# Altium PCB nanoSTM32.PcbDoc
Units mm, origin at the board's own origin, x right, y up, seen from the top; angles counter-clockwise.
Board outline 60.2 x 25.4 mm, 2 copper layers (Top Layer, Bottom Layer); 24 components, 45 nets, 142 pads, 47 vias.
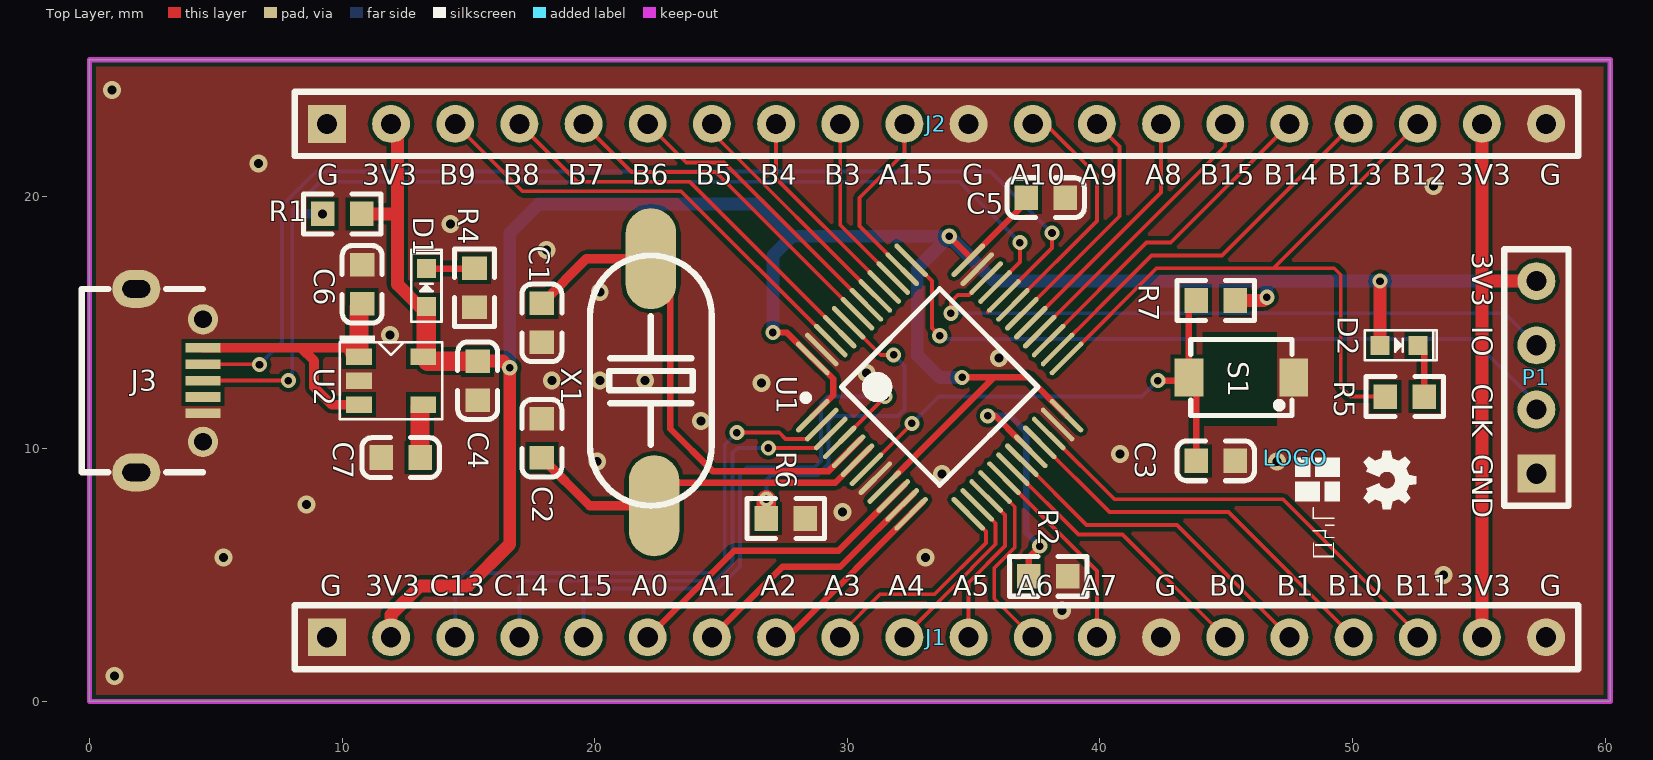
[diagram p0: Top Layer view]
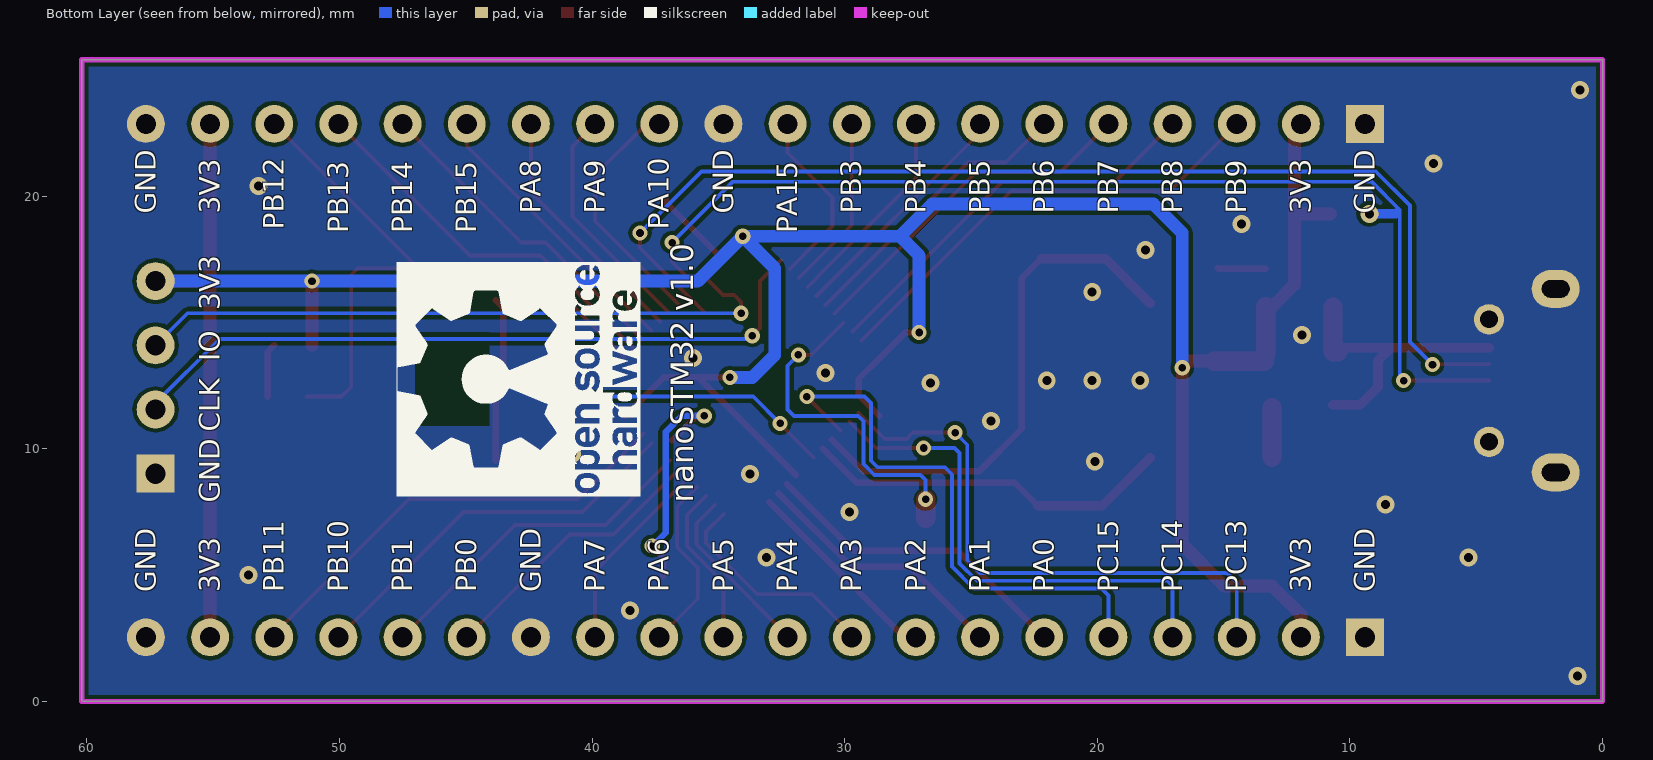
[diagram p1: Bottom Layer view, seen from below]
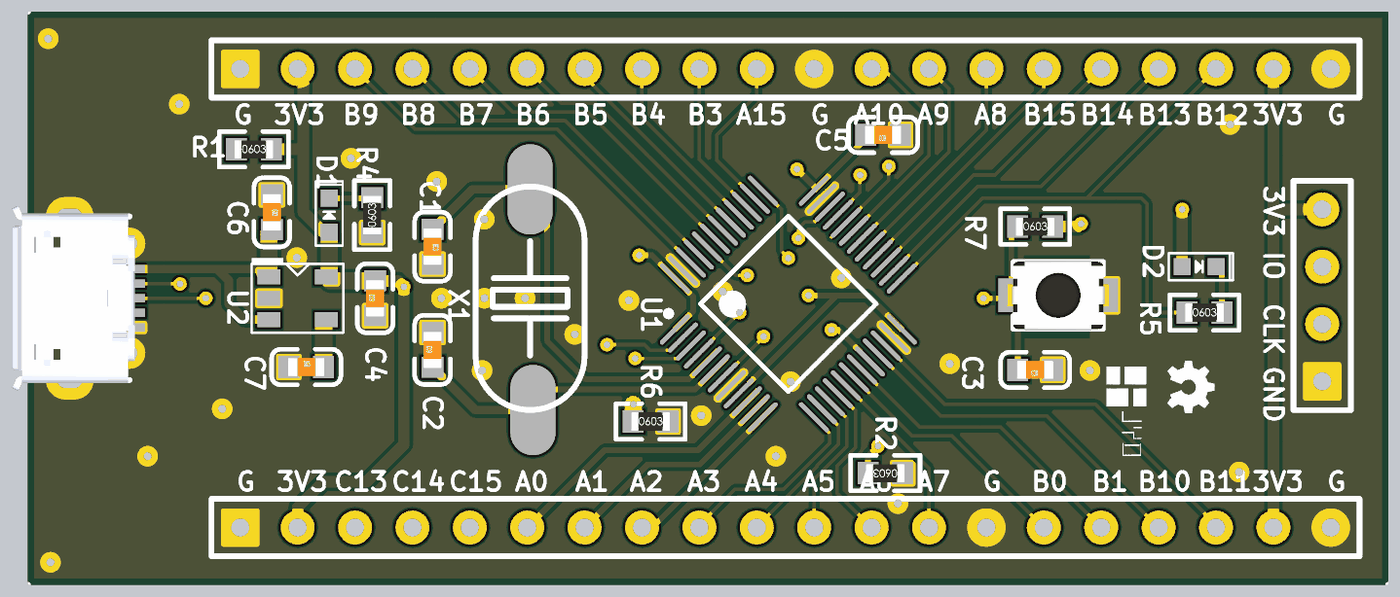
[diagram p2: 3D render of the assembled board from above, using the file's embedded part models]

## Layer stack, top to bottom
Top Solder: solder mask 0.0102, Solder Resist, Dk 3.5
Top Layer: signal copper 0.0356
Dielectric1: dielectric 0.32, FR-4, Dk 4.8
Bottom Layer: signal copper 0.0356
Bottom Solder: solder mask 0.0102, Solder Resist, Dk 3.5

## Board outline
0,0 60.198,0 60.198,25.4 0,25.4

## Design rules (kind name [scope] priority, off if disabled: settings)
Clearance [All] p1: gap=0.152 ignorepadtopadclearanceinfootprint=FALSE except(0: Arc-Hole Track-Hole SMDPad-Hole THPad-Hole Via-Hole Fill-Hole Poly-Hole Region-Hole Text-Hole)
ComponentClearance [All] p1 off: gap=0.254 collisioncheckmode=3 verticalgap=0.254 showdistances=FALSE
DiffPairsRouting [All] p1: maxlimit=0.254 minlimit=0.254 mostfreqgap=0.254 toplayer_minwidth=0.381 toplayer_maxwidth=0.381 toplayer_prefwidth=0.381 bottomlayer_minwidth=0.381 bottomlayer_maxwidth=0.381 bottomlayer_prefwidth=0.381 maxuncoupledlength=12.7
PolygonConnect [All] p1: connectstyle=Direct reliefconductorwidth=0.254 reliefentries=4 polygonreliefangle="90 Angle" airgapwidth=0.254
RoutingVias [All] p1: holewidth=0.711 width=1.27 viastyle="Through Hole" minholewidth=0.711 minwidth=1.27 maxholewidth=0.711 maxwidth=1.27
SolderMaskExpansion [All] p1: expansion=0.102
Width [All] p1: maxlimit=2.54 minlimit=0.152 preferedwidth=0.254
28 further rules are at their usual default settings.

## Classes and differential pairs
differential pair USB: +USB_P -USB_N

## Components (designator, comment, footprint, x,y, rotation, side; value= is the part's Value field where it differs from the comment)
C1 "C0603" 0603_C 17.907,14.986 r270 top value=20pF
C2 "C0603" 0603_C 17.907,10.414 r90 top value=20pF
C3 "C0603" 0603_C 44.577,9.525 r180 top value=0.1uF
C4 "1uf" 0603_C 15.367,12.7 r90 top value=1uF
C5 "104" 0603_C 37.846,19.939 r180 top value=0.1uF
C6 "1uf" 0603_C 10.795,16.51 r270 top value=1uF
C7 "223" 0603_C 12.319,9.652 r0 top
D1 "RED" 0603_LED 13.335,16.383 r90 top
D2 "GREEN" 0603_LED 51.835,14.097 r0 top
J1 "Header 20" HEADER_20x1 9.398,2.54 r0 top
J2 "Header 20" HEADER_20x1 9.398,22.86 r0 top
J3 "Micro USB B" MICRO_USB 3.175,12.7 r90 top
LOGO "LOGO" LOGO 47.752,9.652 r270 top (schematic designator logo)
P1 "Header 4" HEADER_4x1 57.277,9.017 r90 top
R1 "R0603" 0603_R 10,19.3 r0 top value=1.5K
R2 "R0603" 0603_R 37.948,4.953 r180 top value=10K
R4 "R0603" 0603_R 15.24,16.383 r90 top value=1K
R5 "R0603" 0603_R 52.07,12.065 r0 top value=1K
R6 "R0603" 0603_R 27.559,7.239 r0 top value=10K
R7 "R0603" 0603_R 44.577,15.875 r0 top value=10K
S1 "SW-PB" SMT_SW_PTS_820 45.593,12.827 r180 top
U1 "STM32F103C8T6" LQFP48_N 33.655,12.446 r45 top
U2 "RT9193-33" SOT23-5 11.938,12.7 r90 top
X1 "XTAL" 49SMD 22.225,12.7 r270 top value=8MHz

## Footprints (in the part's own frame and the unit in brackets; to place one, negate y for a bottom-side part, rotate by r counter-clockwise, add the part's x,y. Pads: shape width x height; smd on the part's side, far side on the other; paste and mask are expansions set on the pad)
49SMD [mm]
  oval 4x2 smd: 1(-4.826,0) 2(4.953,0.127)
  silkscreen extent -4.95,-2.41 4.95,2.41
0603_C [mm]
  rect 0.93x0.98 smd: 1(-0.77,0) 2(0.77,0)
  silkscreen extent -1.53,-0.79 1.54,0.79, body extent -0.8,-0.4 0.8,0.4, height 0.3
0603_LED [mm]
  rect 0.75x0.75 smd: 1(-0.75,0) 2(0.75,0)
  silkscreen extent -1.35,-0.6 1.5,0.6
0603_R [mm]
  rect 0.93x0.98 smd: 1(-0.77,0) 2(0.77,0)
  silkscreen extent -1.53,-0.79 1.54,0.79, body extent -0.85,-0.4 0.85,0.4, height 0.56
HEADER_4x1 [mm]
  rect 1.5x1.5 hole 0.8: 1(0,0)
  round 1.5 hole 0.8: 2(2.54,0) 3(5.08,0) 4(7.62,0)
  silkscreen extent -1.27,-1.27 8.89,1.27
HEADER_20x1 [mm]
  rect 1.5x1.5 hole 0.8: 1(0,0)
  round 1.5 hole 0.8: 2(2.54,0) 3(5.08,0) 4(7.62,0) 5(10.16,0) 6(12.7,0) 7(15.24,0) 8(17.78,0) 9(20.32,0) 10(22.86,0) 11(25.4,0) 12(27.94,0) 13(30.48,0) 14(33.02,0) 15(35.56,0) 16(38.1,0) 17(40.64,0) 18(43.18,0) 19(45.72,0) 20(48.26,0)
  silkscreen extent -1.27,-1.27 49.53,1.27
LOGO [mm]
  silkscreen extent -0.01,-0.01 3.95,1.74
LQFP48_N [mm]
  oval 1.8x0.2 smd: 1(-4.35,2.75) 2(-4.35,2.25) 3(-4.35,1.75) 4(-4.35,1.25) 5(-4.35,0.75) 6(-4.35,0.25) 7(-4.35,-0.25) 8(-4.35,-0.75) 9(-4.35,-1.25) 10(-4.35,-1.75) 11(-4.35,-2.25) 12(-4.35,-2.75) 25(4.35,-2.75) 26(4.35,-2.25) 27(4.35,-1.75) 28(4.35,-1.25) 29(4.35,-0.75) 30(4.35,-0.25) 31(4.35,0.25) 32(4.35,0.75) 33(4.35,1.25) 34(4.35,1.75) 35(4.35,2.25) 36(4.35,2.75)
  oval 0.2x1.8 smd: 13(-2.75,-4.35) 14(-2.25,-4.35) 15(-1.75,-4.35) 16(-1.25,-4.35) 17(-0.75,-4.35) 18(-0.25,-4.35) 19(0.25,-4.35) 20(0.75,-4.35) 21(1.25,-4.35) 22(1.75,-4.35) 23(2.25,-4.35) 24(2.75,-4.35) 37(2.75,4.35) 38(2.25,4.35) 39(1.75,4.35) 40(1.25,4.35) 41(0.75,4.35) 42(0.25,4.35) 43(-0.25,4.35) 44(-0.75,4.35) 45(-1.25,4.35) 46(-1.75,4.35) 47(-2.25,4.35) 48(-2.75,4.35)
  silkscreen extent -4.17,-2.75 2.75,3.57
MICRO_USB [mil]
  rect 15x54 smd: 1(51,-52) 2(25.5,-52) 3(0,-52) 4(-25.5,-52) 5(-51,-52)
  oval 59.06x74.8 hole 27.56 slot 43.31 at 90 deg: 6(-143,52) 7(143,52)
  round 47.24 hole 27.5: 8(95.5,-52) 9(-95.5,-52)
  silkscreen extent -143,-52 143,137, body extent -161,-61 161,152, height 105
SMT_SW_PTS_820 [mm] "SMT Tactile ?Switch PTS 820 Series"
  rect 1.143x1.5 smd: 1(-2.075,0) 2(2.075,0)
  round 0 all layers, no hole paste-2.54 mask-2.54: MH1(0,0.9) MH2(0,-0.9)
  silkscreen extent -2,-1.5 2,1.5, body extent -2.25,-1.55 2.25,1.55, height 2.05
SOT23-5 [mil]
  rect 26x40 smd: 1(37.4,50) 2(0,50) 3(-37.4,50) 4(-37.4,-50) 5(37.4,-50)
  silkscreen extent -60,-80 70,80

## Part data
C1 C2 C3: "Capacitor", LatestRevisionDate=17-Jul-2002, LatestRevisionNote="Re-released for DXP Platform.", PackageDescription="Radial Cap, Thru-Hole; 2 Leads; 0.3 in Pin Spacing", PackageReference=RAD-0.3, Published=8-Jun-2000, Publisher="Altium Limited"
C4 C5 C6 C7: library part CAP, "Capacitor"
D1 D2: library part D0603, "Typical RED, GREEN, YELLOW, AMBER GaAs LED", LatestRevisionDate=17-Jul-2002, LatestRevisionNote="Re-released for DXP Platform.", PackageDescription="SM LED; 2 Flat Leads", PackageReference=3.2X1.6X1.1, PackageVersion=Feb-2002, Published=8-Jun-2000, Publisher="Altium Limited"
LOGO: library part logo
P1: "Header, 4-Pin", LatestRevisionDate=17-Jul-2002, LatestRevisionNote="Re-released for DXP Platform.", Publisher="Altium Limited"
R1 R2 R4 R5 R6 R7: "Resistor", LatestRevisionDate=17-Jul-2002, LatestRevisionNote="Re-released for DXP Platform.", PackageDescription="Axial Device, Thru-Hole; 2 Leads; 0.3 in Pin Spacing", PackageReference=AXIAL-0.3, Published=8-Jun-2000, Publisher="Altium Limited"
S1: "Switch", LatestRevisionDate=17-Jul-2002, LatestRevisionNote="Re-released for DXP Platform.", PackageDescription="Switch; 2 Leads", PackageReference=SPST-2, Published=24-Mar-1999, Publisher="Altium Limited"
U1: "LowPower MCU"

## Via types
v1: diameter 0.711, hole 0.356, Top Layer to Bottom Layer, 26 vias
v2: diameter 0.6, hole 0.3, Top Layer to Bottom Layer, 21 vias

## Nets (pads, with @x,y where several pads share a name; then routed paths per layer and width w, separated by ;. In a path a pad name is that pad's centre, name@x,y a point inside that pad or via, vN(x,y) a via of type N, cw(c..) or ccw(c..) an arc to the next point about the centre after c; other vN are vias at no path point)
3V3: C4.2 C5.2 D1.1 D2.1 J1.2 J1.19 J2.2 J2.19 P1.4 R1.2 R7.2 U1.1 U1.9 U1.24 U1.36 U1.48 U2.5 | length 134.7
  Top Layer w0.254: v2(27.051,14.605) 27.607,14.605 U1.48 29.439,12.773 29.439,12.119 U1.1 ; U1.9@31.929,8.952 35.804,12.827 ; v2(34.036,18.415) 34.828,17.623 34.828,17.508 37.076,19.756 C5.2 ; v2(34.544,12.827) 35.804,12.827 ; U1.24 37.163,12.827 35.804,12.827
  Top Layer w0.381: U2.5@13.335,13.777 U2.5 U2.5@13.388,13.47
  Top Layer w0.508: R1.2 12.192,19.3 ; J1.2 11.938,3.429 13.081,4.572 14.986,4.572 16.637,6.223 v2(16.637,13.208) 16.375,13.47 C4.2 ; J2.2 12.192,22.606 12.192,19.3 ; D1.1 13.069,15.633 12.192,16.51 12.192,19.3 ; R7.2 46.482,15.875 v2(46.609,16.002) ; D2.1 v2(51.085,16.637) ; J1.19 55.118,16.637 ; J2.19 55.118,16.637 ; P1.4 55.118,16.637
  Top Layer w0.762: U2.5@13.335,13.777 D1.1 ; U2.5@13.388,13.47 C4.2
  Bottom Layer w0.508: v2(16.637,13.208) 16.637,18.542 17.78,19.685 26.543,19.685 27.813,18.415 ; v2(27.051,14.605) 27.051,17.653 27.813,18.415 ; v2(34.544,12.827) 33.655,12.827 32.766,13.716 32.766,17.145 v2(34.036,18.415) ; v2(46.609,16.002) 46.609,16.637 ; P1.4 v2(51.085,16.637) 46.609,16.637 ; 27.813,18.415 v2(34.036,18.415) ; v2(34.036,18.415) 35.814,16.637 46.609,16.637
5V_USB: C6.2 J3.1 U2.1 U2.3 | length 12
  Top Layer w0.381: J3.1 8.382,13.995 ; U2.1@10.475,13.843 10.323,13.995 8.382,13.995 ; U2.3 9.586,11.75 8.89,12.446 8.89,13.487 8.382,13.995 ; C6.2@10.668,15.613 C6.2
  Top Layer w0.762: U2.1@10.475,13.843 10.668,13.843 C6.2@10.668,15.613
BOOT0: R6.1 U1.44 | length 13.8
  Top Layer w0.152: U1.44 31.324,13.716 v2(31.832,13.716)
  Top Layer w0.254: v2@26.789,7.993 v2(26.797,8.001)
  Top Layer w0.762: R6.1 v2@26.789,7.993
  Bottom Layer w0.152: v2(26.797,8.001) 26.797,8.763 27,8.966 28.828,8.966 29.261,9.399 29.261,11.1 29.464,11.303 32.004,11.303 32.258,11.557 32.258,13.29 v2(31.832,13.716)
BOOT1: R2.2 U1.20 | length 9.6
  Top Layer w0.254: v2(35.56,11.303) 35.859,11.303 U1.20@36.818,10.343 ; R2.2 37.178,5.707 v2(37.617,6.147)
  Bottom Layer w0.254: v2(35.56,11.303) 36.449,11.303 37.084,10.668 37.084,6.68 v2(37.617,6.147)
GND: C1.2 C2.2 C3.1 C4.1 C5.1 C6.1 C7.1 J1.1 J1.14 J1.20 J2.1 J2.11 J2.20 J3.5 J3.6 J3.7 J3.8 J3.9 P1.1 R2.1 R4.1 R6.2 S1.1 U1.8 U1.23 U1.35 U1.47 U2.2
  other v1: 1,1 38.5,3.6 53.6,5 5.3,5.7 33.1,5.7 29.8,7.5 8.6,7.8 33.75,9 20.1,9.5 47,9.5 40.8,9.8 24.2,11.1 26.6,12.6 18.3,12.7 20.2,12.7 22,12.7 30.75,13 36,13.6 11.9,14.5 20.2,16.2 18.093,17.873 14.3,18.9 53.2,20.4 6.7,21.3 0.9,24.2
NetC1_1: C1.1 U1.5 X1.1 | length 20.8
  Top Layer w0.254: X1.1 22.987,16.764 22.987,10.795 24.663,9.119 29.267,9.119 U1.5 U1.5@30.515,10.367
  Top Layer w0.381: C1.1 19.677,17.526 X1.1
NetC2_1: C2.1 U1.6 X1.2 | length 14.7
  Top Layer w0.254: X1.2 23.266,8.661 29.517,8.661 U1.6@30.868,10.013
  Top Layer w0.381: C2.1 19.804,7.747 X1.2
NetC7_2: C7.2 U2.4 | length 2.1
  Top Layer w0.381: U2.4@13.089,11.631 U2.4
  Top Layer w0.762: C7.2 U2.4@13.089,11.631
NetD1_2: D1.2 R4.2 | length 1.9
  Top Layer w0.254: D1.2 15.22,17.133 R4.2
NetD2_2: D2.2 R5.2 | length 2.1
  Top Layer w0.254: D2.2 52.84,13.842 R5.2
NRST: C3.2 R7.1 S1.2 U1.7 | length 20.1
  Top Layer w0.152: U1.7@31.222,9.659 v2@32.557,10.994
  Top Layer w0.254: v2(42.291,12.7) S1.2@43.518,12.7 ; C3.2 43.807,12.411 S1.2@43.518,12.7 ; R7.1 43.518,15.586 S1.2@43.518,12.7
  Bottom Layer w0.152: v2(32.557,11.004) 33.617,12.065 41.656,12.065 v2(42.291,12.7)
PA0: J1.6 U1.10 | length 12.7
  Top Layer w0.254: J1.6 25.527,5.969 29.653,5.969 U1.10@32.283,8.599
PA1: J1.7 U1.11 | length 10.4
  Top Layer w0.254: J1.7 27.432,5.334 29.725,5.334 U1.11@32.636,8.245
PA2: J1.8 U1.12 | length 8
  Top Layer w0.254: J1.8 27.638,2.54 U1.12@32.99,7.892
PA3: J1.9 U1.13 | length 8.9
  Top Layer w0.152: J1.9 J1.9@29.718,2.661 ; J1.9@29.718,2.781 J1.9@29.718,2.661 ; U1.13 35.484,6.728 35.484,6.273 33.453,4.242 31.299,4.242 J1.9@29.718,2.661
PA4: J1.10 U1.14 | length 7
  Top Layer w0.152: J1.10 32.258,2.59 34.925,5.257 34.925,5.283 35.865,6.223 35.865,7.054 U1.14
PA5: J1.11 U1.15 | length 6.5
  Top Layer w0.152: J1.11 34.798,4.699 36.246,6.147 36.246,7.38 U1.15
PA6: J1.12 U1.16 | length 7.2
  Top Layer w0.152: U1.16 36.627,7.706 36.627,6.097 35.814,5.284 35.814,4.064 J1.12
PA7: J1.13 U1.17 | length 7.8
  Top Layer w0.152: U1.17 39.878,5.162 J1.13
PA8: J2.14 U1.29 | length 9.9
  Top Layer w0.152: U1.29@37.303,15.033 42.418,20.148 J2.14
PA9: J2.13 U1.30 | length 9.4
  Top Layer w0.152: U1.30@36.95,15.387 40.767,19.204 40.767,21.971 J2.13
PA10: J2.12 U1.31 | length 9.8
  Top Layer w0.152: U1.31@36.596,15.741 39.878,19.023 39.878,20.828 37.846,22.86 J2.12
PA15: J2.10 U1.38 | length 7.5
  Top Layer w0.152: J2.10@32.004,22.606 J2.10 32.258,21.717 30.48,19.939 30.48,18.821 31.623,17.678 31.623,17.66 U1.38
PB0: J1.15 U1.18 | length 11.2
  Top Layer w0.152: U1.18 39.143,6.604 40.894,6.604 J1.15
PB1: J1.16 U1.19 | length 13.5
  Top Layer w0.152: U1.19 39.47,6.985 43.053,6.985 J1.16
PB3: J2.9 U1.39 | length 7
  Top Layer w0.152: J2.9 29.718,18.858 U1.39
PB4: J2.8 U1.40 | length 8.2
  Top Layer w0.152: J2.8 27.178,20.701 31.064,16.815 31.064,16.805 U1.40
PB5: J2.7 U1.41 | length 9.6
  Top Layer w0.152: J2.7 24.81,22.86 24.81,22.352 U1.41
PB6: J2.6 U1.42 | length 11.6
  Top Layer w0.152: J2.6 23.622,21.336 25.119,21.336 U1.42
PB7: J2.5 U1.43 | length 14
  Top Layer w0.152: J2.5 21.463,20.955 24.792,20.955 U1.43
PB8: J2.4 U1.45 | length 16.1
  Top Layer w0.152: J2.4 19.304,20.574 23.759,20.574 U1.45
PB9: J2.3 U1.46 | length 18.4
  Top Layer w0.152: J2.3 17.145,20.193 23.419,20.193 29.327,14.284 U1.46
PB10: J1.17 U1.21 | length 15.6
  Top Layer w0.152: U1.21@37.634,10.235 40.376,7.493 45.085,7.493 J1.17
PB11: J1.18 U1.22 | length 18
  Top Layer w0.152: U1.22 40.575,8.001 47.244,8.001 52.578,2.667 J1.18
PB12: J2.18 R5.1 U1.25 | length 26.8
  Top Layer w0.152: U1.25@38.717,13.619 42.243,17.145 46.863,17.145 ; R5.1 49.911,12.065 49.53,12.446 49.53,16.891 49.276,17.145 46.863,17.145 ; J2.18 46.863,17.145
PB13: J2.17 U1.26 | length 15.4
  Top Layer w0.152: U1.26@38.364,13.973 39.878,15.487 39.878,15.494 42.037,17.653 44.831,17.653 J2.17
PB14: J2.16 U1.27 | length 13
  Top Layer w0.152: U1.27@38.01,14.326 41.845,18.161 42.799,18.161 J2.16
PB15: J2.15 U1.28 | length 11.2
  Top Layer w0.152: U1.28@37.657,14.68 44.958,21.981 J2.15
PC13: J1.3 U1.2 | length 22.8
  Top Layer w0.152: v2(25.629,10.643) 27.305,10.643 27.559,10.389 28.416,10.389 U1.2 U1.2@29.454,11.427
  Bottom Layer w0.152: J1.3 14.478,4.699 14.859,5.08 24.638,5.08 25.146,5.588 25.146,10.16 v2(25.629,10.643)
PC14: J1.4 U1.3 | length 20.1
  Top Layer w0.152: v2(26.873,10.033) 28.767,10.033 U1.3 U1.3@29.808,11.074
  Bottom Layer w0.152: J1.4 17.018,4.572 17.221,4.775 24.764,4.775 25.451,5.462 25.451,9.83 25.654,10.033 v2(26.873,10.033)
PC15: J1.5 U1.4 | length 22.2
  Top Layer w0.152: U1.4@30.161,10.72 31.496,12.055 v2(31.496,12.065)
  Bottom Layer w0.152: J1.5 19.558,4.191 19.837,4.47 24.891,4.47 25.756,5.335 25.756,8.992 26.035,9.271 28.702,9.271 28.956,9.525 28.956,11.811 29.21,12.065 v2(31.496,12.065)
SWCLK: P1.2 U1.37 | length 28.4
  Top Layer w0.152: U1.37 33.353,16.637 33.353,14.78 v2(33.655,14.478)
  Bottom Layer w0.152: v2(33.655,14.478) 33.782,14.351 54.737,14.351 57.277,11.811 P1.2
SWDIO: P1.3 U1.34 | length 26
  Top Layer w0.152: v2(34.101,15.367) 34.101,15.813 34.372,16.084 34.818,16.084 U1.34@35.535,16.801
  Bottom Layer w0.152: v2(34.101,15.367) 56.007,15.367 P1.3
USB_N: J3.2 U1.32 | length 45.1
  Top Layer w0.152: J3.2 6.718,13.348 v2(6.731,13.335) ; 35.56,15.412 36.242,16.094 38.1,17.952 v2(38.1,18.542)
  Bottom Layer w0.152: v2(6.731,13.335) 7.62,14.224 7.62,19.625 8.976,20.98 35.662,20.98 v2(38.1,18.542)
USB_P: J3.3 R1.1 U1.33 | length 43.7
  Top Layer w0.152: J3.3 v2(7.874,12.7) ; U1.33@35.889,16.448 36.83,17.389 v2(36.83,18.161)
  Bottom Layer w0.152: v2(7.874,12.7) 8.026,12.852 8.026,19.456 9.144,20.574 34.417,20.574 v2(36.83,18.161)
  Bottom Layer w0.381: 8.141,19.342 8.183,19.3 v1(9.23,19.3)
pads on no net: J3.4 S1.MH1 S1.MH2

## Polygon pours and split planes (outlines as drawn)
GND on Top Layer "GND_L01_P000" (solid, remove dead copper, pour order 0): 0.144,25.473 60.342,25.473 60.342,0.073 0.144,0.073
GND on Bottom Layer "GND_L02_P002" (solid, remove dead copper, pour order 2): 0.203,25.349 60.401,25.349 60.401,-0.051 0.203,-0.051

## Keep-outs
Keep-Out Layer:
  the board outline again, w0.2

## Other copper
Top Layer:
  pour cut-out: 44.069,14.605 46.99,14.605 46.99,10.922 44.069,10.922
Bottom Layer:
  pour cut-out: 44.069,14.605 46.99,14.605 46.99,10.922 44.069,10.922

## Silkscreen, mask and mechanical layers (free items; w line width, h text height)
Top Overlay:
  region: 52.516,8.608 52.507,8.605 52.228,8.552 52.22,8.548 52.217,8.542 52.121,8.309 52.118,8.303 52.122,8.295 52.281,8.06 52.285,8.051 52.28,8.04 52.279,8.041 52.079,7.839 52.068,7.834 52.059,7.838 51.825,7.997 51.816,8.001 51.81,7.999 51.577,7.902 51.571,7.9 51.568,7.891 51.514,7.612 51.511,7.604 51.499,7.599 51.499,7.6 51.215,7.599 51.204,7.604 51.2,7.612 51.201,7.612 51.147,7.891 51.144,7.9 51.138,7.902 50.904,7.999 50.899,8.001 50.89,7.997 50.655,7.838 50.647,7.834 50.635,7.839 50.636,7.84 50.434,8.04 50.43,8.051 50.433,8.06 50.593,8.295 50.596,8.303 50.594,8.309 50.55,8.416 50.547,8.422 50.552,8.433 50.558,8.436 51.04,8.632 51.046,8.635 51.057,8.63 51.059,8.625 51.055,8.623 51.121,8.525 51.229,8.453 51.357,8.427 51.485,8.453 51.594,8.525 51.667,8.634 51.692,8.762 51.667,8.89 51.594,8.999 51.485,9.071 51.357,9.097 51.229,9.071 51.121,8.999 51.055,8.901 51.059,8.899 51.057,8.894 51.046,8.889 51.04,8.892 50.558,9.088 50.552,9.091 50.547,9.102 50.55,9.108 50.594,9.215 50.596,9.221 50.593,9.229 50.433,9.464 50.43,9.473 50.434,9.484 50.435,9.483 50.635,9.685 50.647,9.69 50.655,9.686 50.89,9.527 50.899,9.523 50.904,9.525 51.138,9.622 51.144,9.624 51.147,9.633 51.2,9.912 51.204,9.92 51.215,9.925 51.215,9.924 51.499,9.925 51.511,9.92 51.514,9.912 51.568,9.633 51.571,9.624 51.577,9.622 51.81,9.525 51.816,9.523 51.825,9.527 51.824,9.527 52.059,9.686 52.068,9.69 52.079,9.685 52.078,9.684 52.28,9.484 52.285,9.473 52.281,9.464 52.122,9.229 52.118,9.221 52.121,9.215 52.217,8.981 52.22,8.976 52.228,8.972 52.507,8.919 52.516,8.915 52.52,8.904 52.519,8.904 52.52,8.62
  text "G" at 9.017,20.447 h0.81
  text "3V3" at 10.795,20.447 h0.81
  text "B9" at 13.843,20.447 h0.81
  text "B8" at 16.383,20.447 h0.81
  text "B7" at 18.923,20.447 h0.81
  text "B6" at 21.463,20.447 h0.81
  text "B5" at 24.003,20.447 h0.81
  text "B4" at 26.543,20.447 h0.81
  text "B3" at 29.083,20.447 h0.81
  text "A15" at 31.242,20.447 h0.81
  text "G" at 34.544,20.447 h0.81
  text "A10" at 36.449,20.447 h0.81
  text "A9" at 39.243,20.447 h0.81
  text "A8" at 41.783,20.447 h0.81
  text "B15" at 43.942,20.447 h0.81
  text "B14" at 46.482,20.447 h0.81
  text "B13" at 49.022,20.447 h0.81
  text "B12" at 51.562,20.447 h0.81
  text "3V3" at 54.102,20.447 h0.81
  text "G" at 57.404,20.447 h0.81
  text "3V3" at 54.737,17.78 h0.81 r270
  text "IO" at 54.737,14.859 h0.81 r270
  text "CLK" at 54.737,12.573 h0.81 r270
  text "GND" at 54.737,9.779 h0.81 r270
  text "G" at 9.144,4.191 h0.81
  text "3V3" at 10.922,4.191 h0.81
  text "C13" at 13.462,4.191 h0.81
  text "C14" at 16.002,4.191 h0.81
  text "C15" at 18.542,4.191 h0.81
  text "A0" at 21.463,4.191 h0.81
  text "A1" at 24.13,4.191 h0.81
  text "A2" at 26.543,4.191 h0.81
  text "A3" at 29.083,4.191 h0.81
  text "A4" at 31.623,4.191 h0.81
  text "A5" at 34.163,4.191 h0.81
  text "A6" at 36.703,4.191 h0.81
  text "A7" at 39.243,4.191 h0.81
  text "G" at 42.164,4.191 h0.81
  text "B0" at 44.323,4.191 h0.81
  text "B1" at 46.99,4.191 h0.81
  text "B10" at 49.022,4.191 h0.81
  text "B11" at 51.689,4.191 h0.81
  text "3V3" at 54.102,4.191 h0.81
  text "G" at 57.404,4.191 h0.81
Bottom Overlay:
  drawing of 10 lines, arcs and shapes, not listed
  text "GND" at 9.017,19.304 h0.81 r270
  text "3V3" at 11.557,19.304 h0.81 r270
  text "PB9" at 14.097,19.304 h0.81 r270
  text "PB8" at 16.637,19.304 h0.81 r270
  text "PB7" at 19.177,19.304 h0.81 r270
  text "PB6" at 21.717,19.304 h0.81 r270
  text "PB5" at 24.257,19.304 h0.81 r270
  text "PB4" at 26.797,19.304 h0.81 r270
  text "PB3" at 29.337,19.304 h0.81 r270
  text "GND" at 34.417,19.304 h0.81 r270
  text "PA9" at 39.497,19.304 h0.81 r270
  text "PA8" at 42.037,19.304 h0.81 r270
  text "3V3" at 54.737,19.304 h0.81 r270
  text "GND" at 57.277,19.304 h0.81 r270
  text "PA10" at 36.957,18.669 h0.81 r270
  text "PB12" at 52.197,18.669 h0.81 r270
  text "PA15" at 31.877,18.542 h0.81 r270
  text "PB15" at 44.577,18.542 h0.81 r270
  text "PB14" at 47.117,18.542 h0.81 r270
  text "PB13" at 49.657,18.542 h0.81 r270
  text "3V3" at 54.737,15.494 h0.81 r270
  text "IO" at 54.737,13.462 h0.81 r270
  text "CLK" at 54.737,10.668 h0.81 r270
  text "nanoSTM32 v1.0" at 35.687,7.874 h1.52 r270
  text "GND" at 54.737,7.874 h0.81 r270
  text "GND" at 9.017,4.318 h0.81 r270
  text "3V3" at 11.557,4.318 h0.81 r270
  text "PC13" at 14.097,4.318 h0.81 r270
  text "PC14" at 16.637,4.318 h0.81 r270
  text "PC15" at 19.177,4.318 h0.81 r270
  text "PA0" at 21.717,4.318 h0.81 r270
  text "PA1" at 24.257,4.318 h0.81 r270
  text "PA2" at 26.797,4.318 h0.81 r270
  text "PA3" at 29.337,4.318 h0.81 r270
  text "PA4" at 31.877,4.318 h0.81 r270
  text "PA5" at 34.417,4.318 h0.81 r270
  text "PA6" at 36.957,4.318 h0.81 r270
  text "PA7" at 39.497,4.318 h0.81 r270
  text "GND" at 42.037,4.318 h0.81 r270
  text "PB0" at 44.577,4.318 h0.81 r270
  text "PB1" at 47.117,4.318 h0.81 r270
  text "PB10" at 49.657,4.318 h0.81 r270
  text "PB11" at 52.197,4.318 h0.81 r270
  text "3V3" at 54.737,4.318 h0.81 r270
  text "GND" at 57.277,4.318 h0.81 r270

## Dimensions
0,0 to 60.198,0 on Top Overlay
0,25.4 to 0,0 on Top Overlay